# EAGLE board main_board (EAGLE 9.6.2)
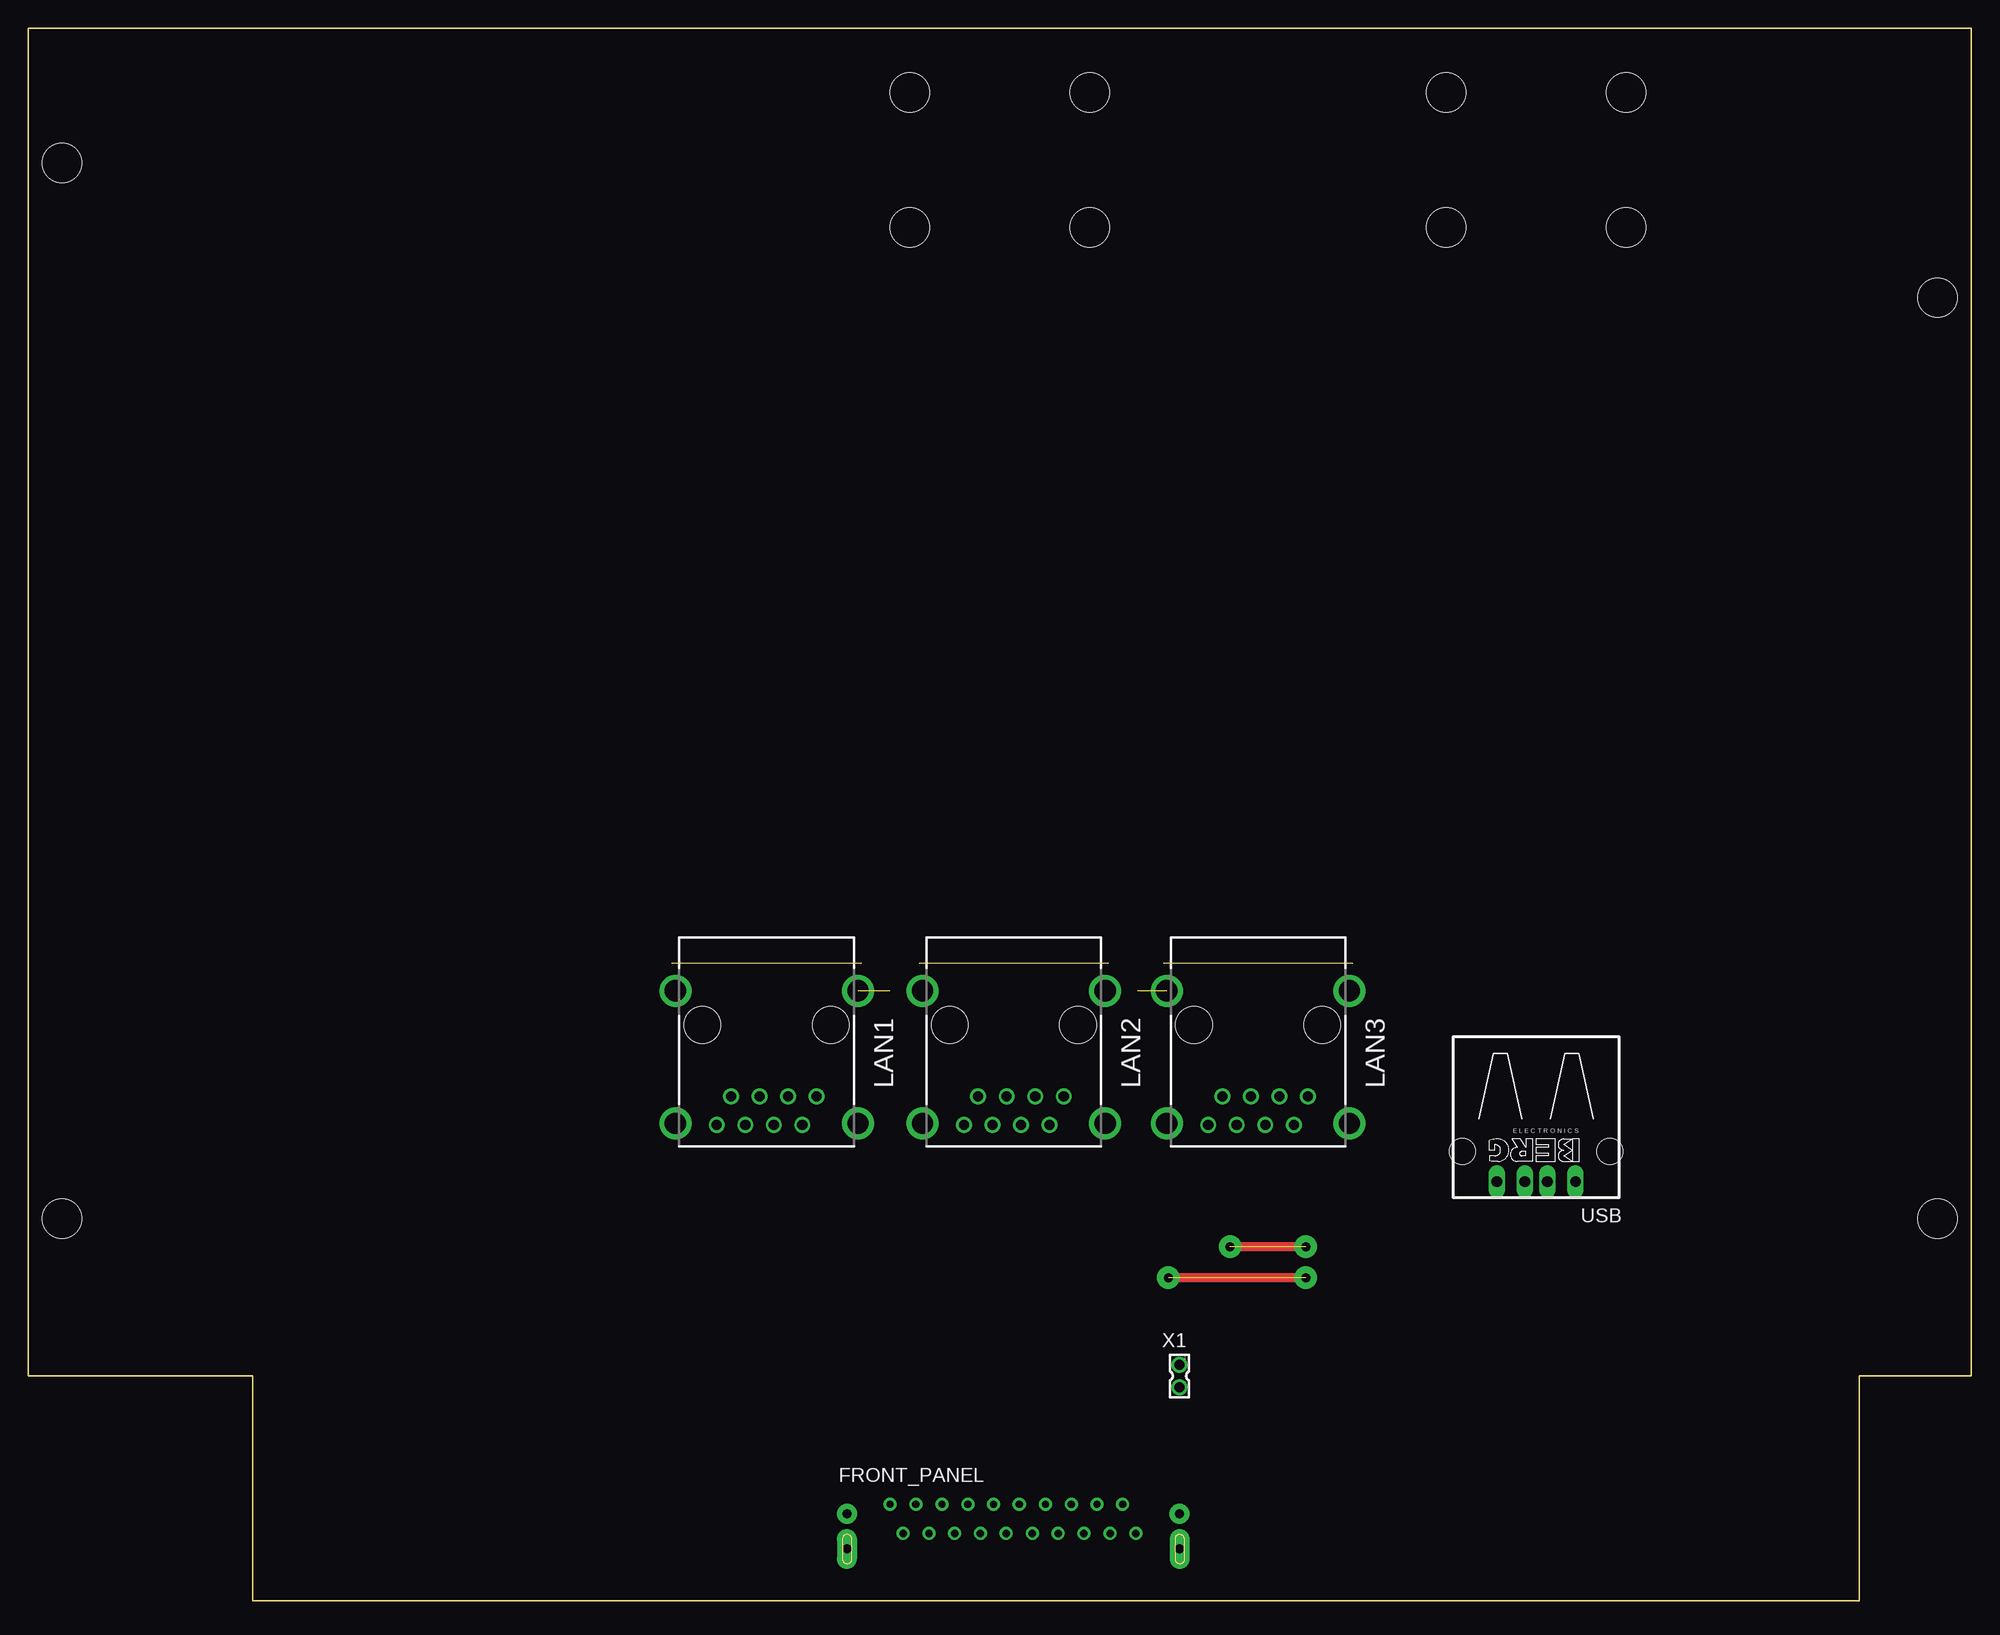
[diagram p0: board, top side]
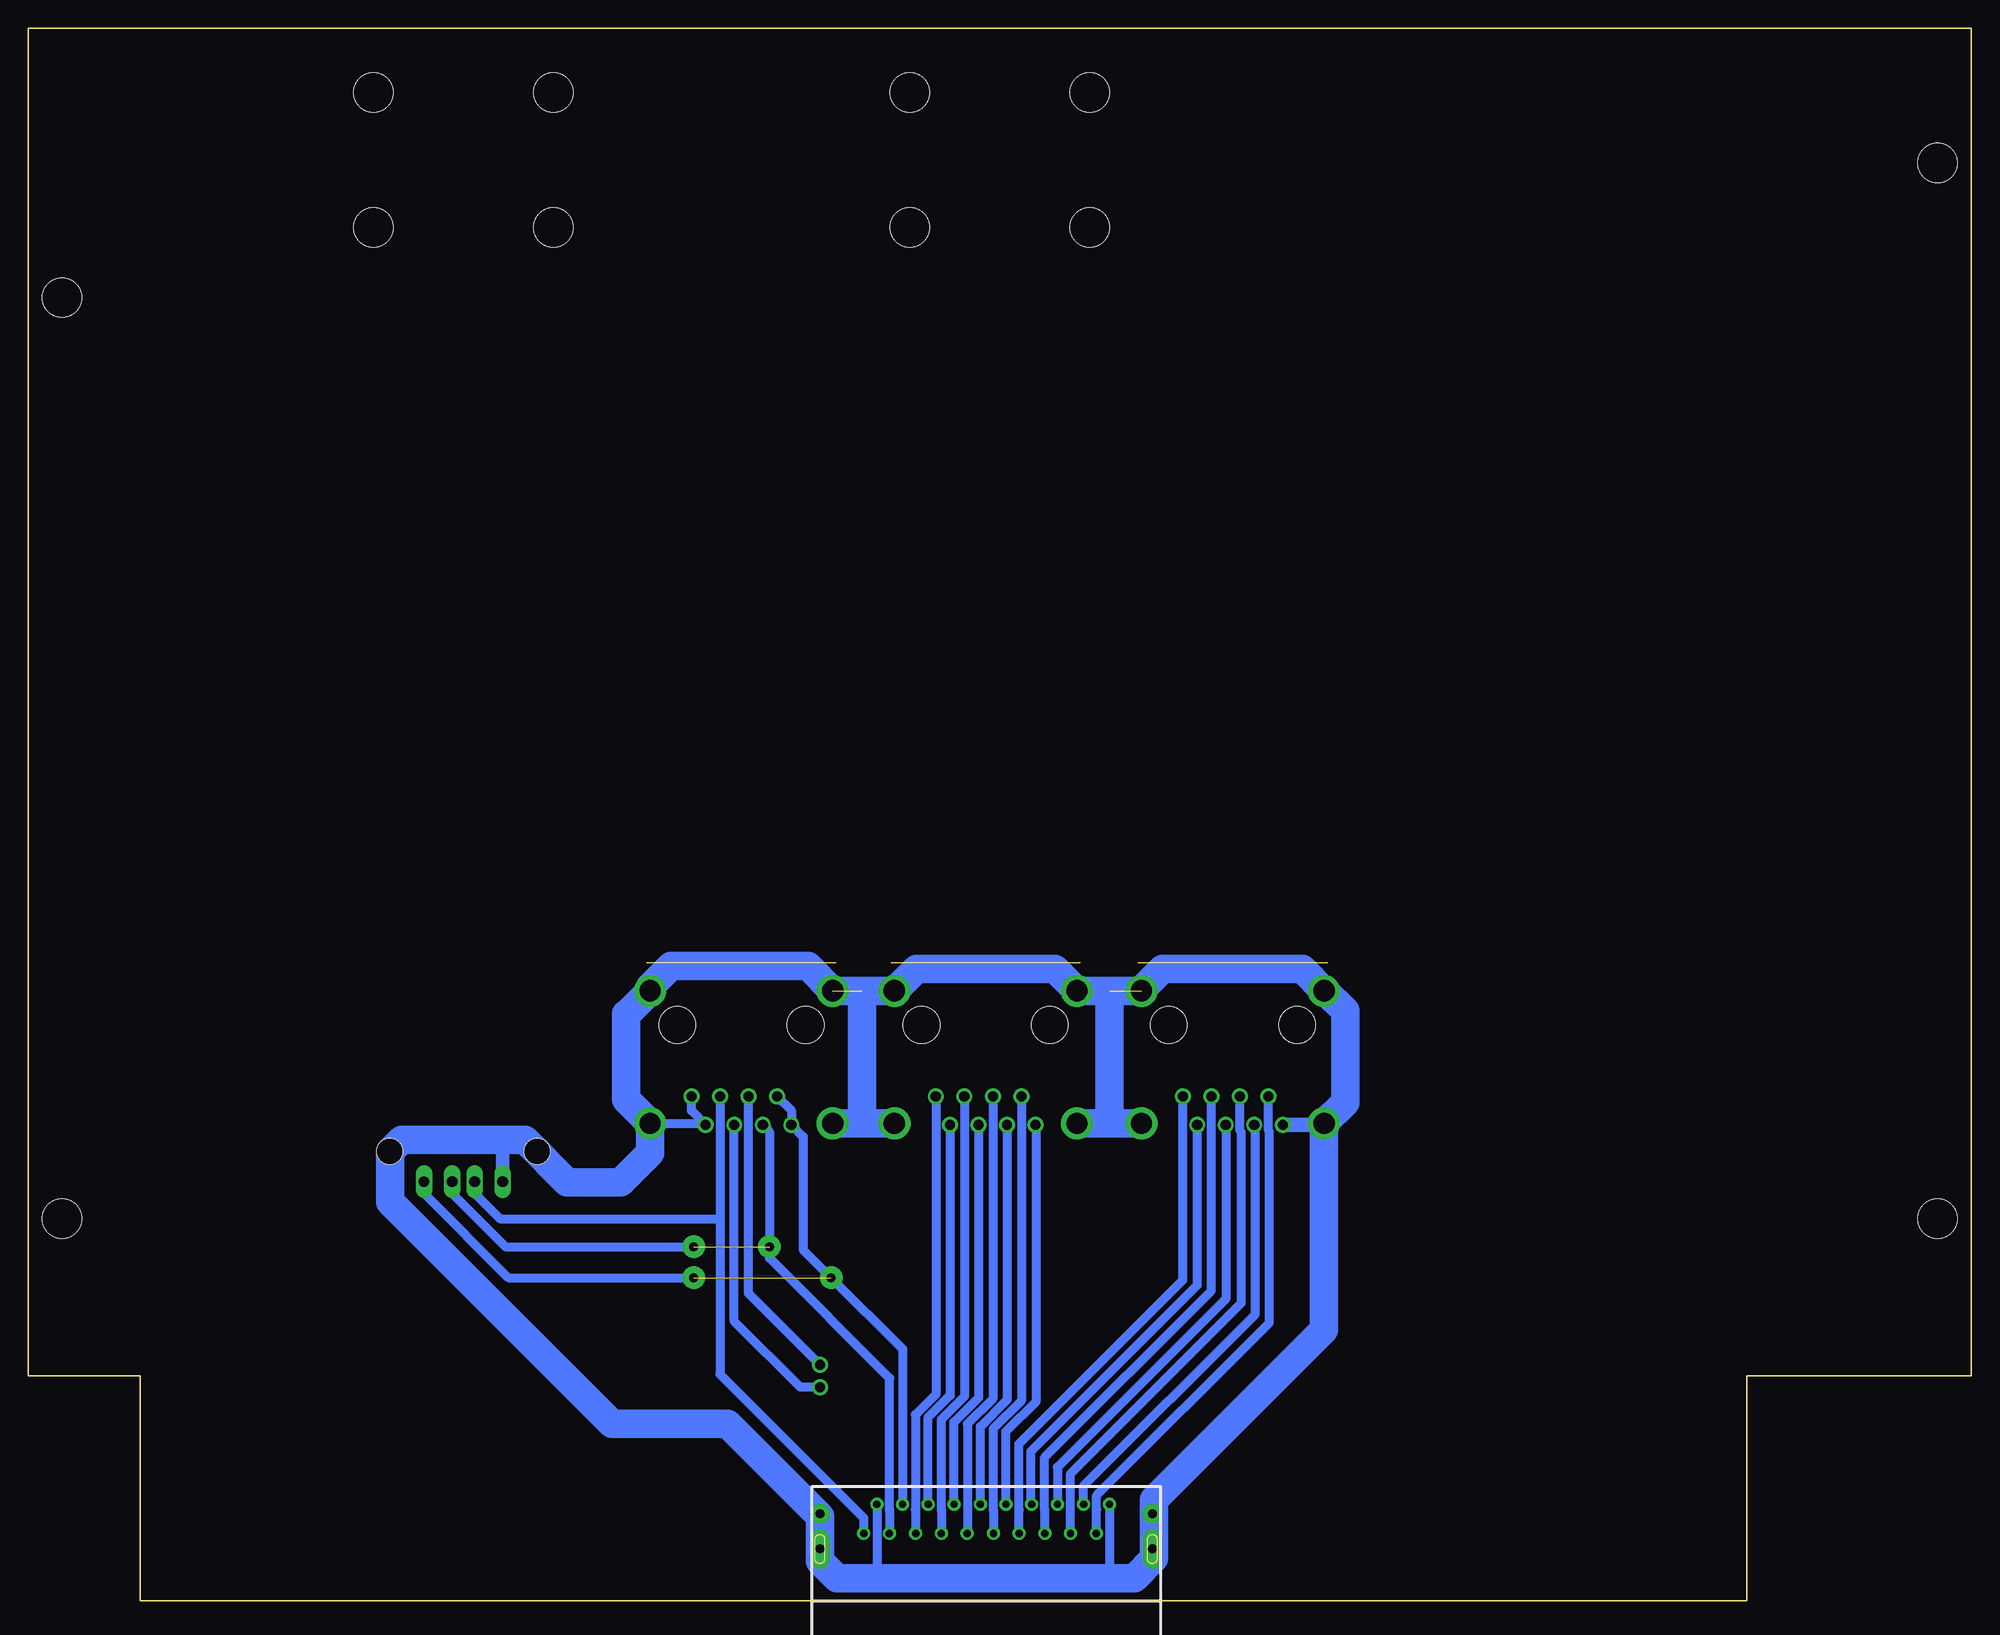
[diagram p1: board, bottom side, seen from below]

Size 173 x 140 mm. Coordinates in mm from the lower left corner, seen from the top.
Outline: 20,0 20,20 0,20 0,140 173,140 173,20 163,20 163,0 20,0
Copper layers (1*16): Top 0.035mm / dielectric 1.5mm / Bottom 0.035mm
Design rules "default": minimum track width 6mil, minimum drill 0.35mm, track to track 6mil, track to pad 6mil, pad to pad 6mil, via to via 6mil, smd to smd 6mil, copper to edge 40mil, drill to drill 6mil, minimum pad ring 10mil, minimum via ring 8mil, stop-mask expansion 4mil, vias tented up to drill 0mil, thermal gap 10mil
Holes 3.5 mm at 3,128 3,34 170,34 170,116 78.5,122.25 94.5,122.25 78.5,134.25 94.5,134.25 126.25,122.25 142.25,122.25 126.25,134.25 142.25,134.25

## Footprints (pad centres in the part's own frame; a part is rotated, then mirrored left to right if it is on the bottom)
ALPINE-FP-20 = drill 0.65: 1 -9.865,1.37; 2 -8.695,-1.22; 3 -7.575,1.37; 4 -6.405,-1.22; 5 -5.235,1.37; 6 -4.115,-1.22; 7 -2.945,1.37; 8 -1.825,-1.22; 9 -0.655,1.37; 10 0.465,-1.22; 11 1.635,1.37; 12 2.805,-1.22; 13 3.975,1.37; 14 5.095,-1.22; 15 6.265,1.37; 16 7.385,-1.22; 17 8.555,1.37; 18 9.725,-1.22; 19 10.845,1.37; 20 12.015,-1.22 | drill 0.8 pad 1.778: P$1 -13.7,0.55; P$2 15.9,0.55 | drill 0.8 pad 1.778 long: P$3 -13.7,-2.6; P$4 15.9,-2.6
RJ45-SHIELD1 = drill 0.9 pad 1.4: 1 -4.445,6.35; 2 -3.175,8.89; 3 -1.905,6.35; 4 -0.635,8.89; 5 0.635,6.35; 6 1.905,8.89; 7 3.175,6.35; 8 4.445,8.89 | drill 1.9 pad 2.5: S1 -8.128,-3.048; S2 8.128,-3.048; S3 -8.128,8.76; S4 8.128,8.76 | hole 3.251: -5.715,0; 5.715,0
PN87520 = drill 0.95 long: 1 -3.5,2.71; 2 -1,2.71; 3 1,2.71; 4 3.5,2.71 | hole 2.3: -6.57,0; 6.57,0
332-02 = drill 0.9 pad 1.27: 1 0,-1; 2 0,1

## Placement (x,y rotation side)
FRONT_PANEL  ALPINE-FP-20  [ALPINE-FP-20]  86.6,7.2 0 top
LAN1  RJ45-8L21-B  [RJ45-SHIELD1]  65.75,51.25 180 top
LAN2  RJ45-8L21-B  [RJ45-SHIELD1]  87.75,51.25 180 top
LAN3  RJ45-8L21-B  [RJ45-SHIELD1]  109.5,51.25 180 top
USB  [PN87520]  134.25,40 180 top
X1  332-02  [332-02]  102.5,20 180 top

## Library data of the parts
FRONT_PANEL = con-alpine
LAN1-LAN3 = con-tycoelectronics; OC_FARNELL: unknown; OC_NEWARK: unknown
USB = con-berg; OC_FARNELL: unknown; OC_NEWARK: unknown
X1 = con-garry

## Nets
GND: FRONT_PANEL.1 FRONT_PANEL.19 LAN1.8 LAN1.S1 LAN1.S2 LAN1.S3 LAN1.S4 LAN2.S1 LAN2.S2 LAN2.S3 LAN2.S4 LAN3.1 LAN3.2 LAN3.S1 LAN3.S2 LAN3.S3 LAN3.S4 USB.4
N$1: FRONT_PANEL.17 LAN3.7 LAN3.8 USB.1
N$2: FRONT_PANEL.18 LAN3.6 USB.2
N$4: FRONT_PANEL.20 LAN3.3 USB.3
N$5: FRONT_PANEL.2 LAN1.7
N$6: FRONT_PANEL.3 LAN1.6
N$7: FRONT_PANEL.4 LAN1.5
N$8: FRONT_PANEL.5 LAN1.4
N$9: FRONT_PANEL.6 LAN1.3
N$10: FRONT_PANEL.7 LAN1.2
N$11: FRONT_PANEL.8 LAN1.1
N$12: FRONT_PANEL.9 LAN2.8
N$13: FRONT_PANEL.10 LAN2.7
N$14: FRONT_PANEL.11 LAN2.6
N$15: FRONT_PANEL.12 LAN2.5
N$16: FRONT_PANEL.13 LAN2.4
N$17: FRONT_PANEL.14 LAN2.3
N$18: FRONT_PANEL.15 LAN2.2
N$19: FRONT_PANEL.16 LAN2.1
N$20: LAN3.5 X1.1
N$21: LAN3.4 X1.2

## Tracks (layer width: path | path; a pad name or v marks a point on that pad's centre or on a via)
GND  (2 unrouted)
  Bottom 0.813: 57.75,42.36 LAN1.S4 | 101.5,42.36 LAN3.S4 | LAN3.1 113.94,43.63 LAN3.2 112.81,42.49 LAN3.S3 117.5,42.36 | FRONT_PANEL.1 76.73,2.02 76.75,2 | FRONT_PANEL.19 97.44,2.06 97.5,2
  Bottom 1.2: USB.4 130.75,41
  Bottom 1.27: LAN1.8 57.75,42.36
  Bottom 2.54: LAN2.S3 98.75,42.49 | 98.75,42.49 LAN3.S4 | 98.75,42.49 98.75,54.3 | LAN1.S3 76.75,42.49 | 76.75,42.49 LAN2.S4 | 76.75,42.49 76.75,54.3 | 57.59,54.33 55.75,52.5 55.75,44.36 LAN1.S4 57.62,24.13 72.75,9 72.75,3.75 74.5,2 76.75,2 97.5,2 101,2 102.5,3.5 102.5,7.5 110.75,15.75 121,15.75 140.75,35.5 140.75,40 139.75,41 130.75,41 128.75,41 125,37.25 120.25,37.25 117.63,39.87 LAN3.S3 119.75,44.61 119.75,52.25 119.68,52.25 LAN3.S1 117.63,54.62 115.75,56.5 103.57,56.5 LAN3.S2 LAN2.S1 93.93,56.25 81.57,56.25 LAN2.S2 LAN1.S1 73.88,54.37 72,56.25 59.57,56.25 LAN1.S2
N$1  (via drill 0.8 pad 2)  (1 unrouted)
  Top 0.813: v113.75,28.75 v101.5,28.75
  Bottom 0.813: LAN3.7 105.06,43.63 LAN3.8 104,41.3 104,31.25 v101.5,28.75 95.16,22.41 FRONT_PANEL.17 | USB.1 137.75,36.25 130.25,28.75 v113.75,28.75
N$2  (via drill 0.8 pad 2)  (1 unrouted)
  Top 0.813: v113.75,31.5 v107,31.5
  Bottom 0.813: FRONT_PANEL.18 96.33,8.08 96.31,8.1 96.31,19.81 107,30.5 v107,31.5 107,41.77 LAN3.6 | USB.2 135.25,36.25 130.5,31.5 v113.75,31.5
N$4
  Bottom 0.813: LAN3.3 111.41,34 | 111.41,34 111.41,20.16 98.61,7.37 FRONT_PANEL.20 | USB.3 133.25,36.25 131,34 111.41,34
N$5
  Bottom 0.813: FRONT_PANEL.2 77.91,8.08 77.89,8.1 77.89,9.36 62.5,24.75 62.5,41.77 62.57,41.84 62.57,44.89 LAN1.7
N$6
  Bottom 0.813: FRONT_PANEL.3 79.03,10.22 63.75,25.5 63.75,42.27 LAN1.6
N$7
  Bottom 0.813: FRONT_PANEL.4 80.19,11.3 65,26.5 65,41.73 65.11,41.84 LAN1.5
N$8
  Bottom 0.813: LAN1.4 66.39,26.86 81.36,11.88 FRONT_PANEL.5
N$9
  Bottom 0.813: FRONT_PANEL.6 82.48,8.08 82.5,8.1 82.5,12.75 67.66,27.59 LAN1.3
N$10
  Bottom 0.813: LAN1.2 68.92,28.07 83.75,13.25 83.75,8.66 FRONT_PANEL.7
N$11
  Bottom 0.813: FRONT_PANEL.8 84.78,8.08 84.79,8.1 84.79,13.96 70.19,28.55 LAN1.1
N$12
  Bottom 0.813: FRONT_PANEL.9 85.94,15.05 83.25,17.75 83.25,42.3 LAN2.8
N$13
  Bottom 0.813: LAN2.7 84.58,17.79 87.08,15.28 87.08,8.1 87.06,8.08 FRONT_PANEL.10
N$14
  Bottom 0.813: LAN2.6 85.84,17.89 88.23,15.49 FRONT_PANEL.11
N$15
  Bottom 0.813: LAN2.5 87.11,17.98 89.37,15.72 89.37,6.01 FRONT_PANEL.12
N$16
  Bottom 0.813: LAN2.4 88.39,18.07 90.58,15.88 FRONT_PANEL.13
N$17
  Bottom 0.813: LAN2.3 89.66,18.17 91.71,16.11 91.71,8.1 91.69,8.08 FRONT_PANEL.14
N$18
  Bottom 0.813: LAN2.2 90.92,18.27 92.86,16.32 FRONT_PANEL.15
N$19
  Bottom 0.813: LAN2.1 92.19,18.36 94,16.55 94,8.1 93.98,8.08 FRONT_PANEL.16
N$20
  Bottom 0.813: X1.1 108.86,27.36 LAN3.5
N$21
  Bottom 0.813: X1.2 104.25,19 110.14,24.89 LAN3.4